# EAGLE board INTERFACE_MK20DX128VFM5 (EAGLE 7.6.0)
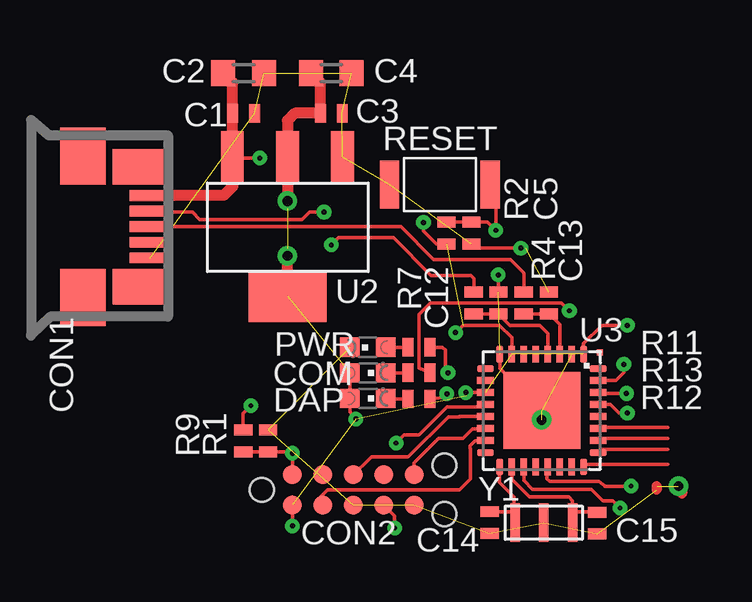
[diagram p0: board, top side]
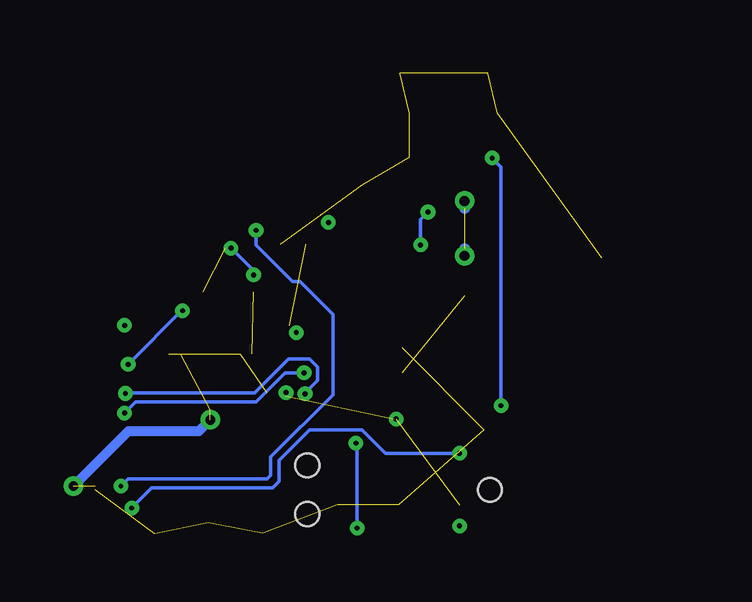
[diagram p1: board, bottom side, seen from below]

No outline drawn. Coordinates in mm, seen from the top.
Copper layers ((1*16)): Top 0.035mm / dielectric 0.8mm / Bottom 0.035mm
Design rules "mbed-HDK-6-6-2-layer": minimum track width 6mil, minimum drill 9mil, track to track 6mil, track to pad 6mil, pad to pad 6mil, via to via 6mil, smd to smd 6mil, copper to edge 15mil, drill to drill 8mil, minimum pad ring 10mil, minimum via ring 8mil, stop-mask expansion 4mil, vias tented up to drill 0mil, thermal gap 10mil

## Footprints (pad centres in the part's own frame; a part is rotated, then mirrored left to right if it is on the bottom)
0402 = smd 0.457 x 0.762: 1 -0.457,0; 2 0.457,0
0603 = smd 1 x 1.1: 1 -0.85,0; 2 0.85,0
USB-MICRO-B-H = smd 1.7 x 0.45: 4 2.8,-0.65; D+ 2.8,0; D- 2.8,0.65; GND 2.8,-1.3; VBUS 2.8,1.3 | smd 1.9 x 2.375: GND1 0,2.95; GND4 0,-2.95 | smd 2.1 x 1.475: GND2 2.3,2.5; GND3 2.3,-2.5
TC2050-IDC-NL = smd 0.787 x 0.787: 1 -2.54,-0.635; 2 -1.27,-0.635; 3 0,-0.635; 4 1.27,-0.635; 5 2.54,-0.635; 6 2.54,0.635; 7 1.27,0.635; 8 0,0.635; 9 -1.27,0.635; 10 -2.54,0.635 | hole 0.991: -3.81,0; 3.81,1.016; 3.81,-1.016
CHIPLED_0603 = smd 0.8 x 0.8: A 0,-0.75; C 0,0.75
SKRKAEE010 = smd 0.8 x 2: P$1 -2.1,0; P$2 2.1,0
SOT223 = smd 0.95 x 2.15: GND -2.3,-5.8; IN 2.3,-5.8; OUT(1) 0,-5.8 | smd 3.25 x 2.15: OUT(2) 0,0
HVQFN33 = smd 0.7 x 0.28: 1 -2.35,1.75; 2 -2.35,1.25; 3 -2.35,0.75; 4 -2.35,0.25; 5 -2.35,-0.25; 6 -2.35,-0.75; 7 -2.35,-1.25; 8 -2.35,-1.75; 17 2.35,-1.75; 18 2.35,-1.25; 19 2.35,-0.75; 20 2.35,-0.25; 21 2.35,0.25; 22 2.35,0.75; 23 2.35,1.25; 24 2.35,1.75 | smd 0.28 x 0.7: 9 -1.75,-2.35; 10 -1.25,-2.35; 11 -0.75,-2.35; 12 -0.25,-2.35; 13 0.25,-2.35; 14 0.75,-2.35; 15 1.25,-2.35; 16 1.75,-2.35; 25 1.75,2.35; 26 1.25,2.35; 27 0.75,2.35; 28 0.25,2.35; 29 -0.25,2.35; 30 -0.75,2.35; 31 -1.25,2.35; 32 -1.75,2.35 | smd 3.2 x 3.2: EXP 0,0 | smd 0.25 x 0.25: M1 -2.415,2.415
CSTCE8M00G55-R0 = smd 0.4 x 1.6: 1 2.4,0; 2 1.2,0; 3 0,0

## Placement (x,y rotation side)
C1  100nF  [0402]  -6.25,9.6 0 top
C2  10uF  [0603]  -6.25,11.28 0 top
C3  100nF  [0402]  -2.59,9.6 0 top
C4  10uF  [0603]  -2.59,11.28 0 top
C5  100nF  [0402]  3.26,4.61 270 top
C12  18pF  [0402]  4.38,1.7 90 top
C13  18pF  [0402]  6.48,1.7 90 top
C14  22pF  [0402]  4.01,-7.46 270 top
C15  22pF  [0402]  8.49,-7.49 270 top
CON1  47346-0001  [USB-MICRO-B-H]  -12.95,4.88 0 top
CON2  TC2050-IDC-NL  [TC2050-IDC-NL]  -1.68,-6.1 0 top
LED3  RED  [CHIPLED_0603]  -1.07,-0.15 90 top
LED4  BLUE  [CHIPLED_0603]  -1.07,-2.29 270 top
LED5  GREEN  [CHIPLED_0603]  -1.07,-1.22 270 top
R1  10K  [0402]  -5.22,-4.05 90 top
R2  10K  [0402]  2.21,4.61 90 top
R4  33R  [0402]  5.43,1.7 270 top
R7  33R  [0402]  3.34,1.7 270 top
R9  4.7K  [0402]  -6.26,-4.05 270 top
R11  470R  [0402]  1.07,-0.15 0 top
R12  1.5K  [0402]  1.07,-2.31 0 top
R13  1.5K  [0402]  1.07,-1.22 0 top
RESET  SKRKAEE010  [SKRKAEE010]  1.93,6.63 0 top
U2  TLV1117LV33DCYR  [SOT223]  -4.42,1.98 180 top
U3  IF_MK20DX128VFM5  [HVQFN33]  6.18,-2.79 270 top
Y1  CSTCE8M00G55-R0  [CSTCE8M00G55-R0]  7.47,-7.47 180 top

## Library data of the parts
C1 C3 C5 C12-C15 R1 R2 R4 R7 R9 R11-R13 = mbed-HDK-RLCQ
C2 C4 = mbed-HDK-RLC
CON1 = mbed-HDK-Connector; MF: MOLEX; MFN: 47346-0001; OC-MOUSER: 538-47346-0001; OC-NEWARK: 1568026
CON2 = mbed-HDK-Connector
LED3-LED5 = mbed-HDK-Optical; MF: Wurth Electronics Inc; MFN: 150060RS75000; OC-DIGIKEY: 732-4978-1-ND; OC-MOUSER: 710-150060RS75000; OC-NEWARK: 2322071
RESET = mbed-HDK-Switch; MF: ALPS; MFN: SKRKAEE010; OC-MOUSER: 688-SKRKAE
U2 = mbed-HDK-Power; MF: Texas Instruments; MFN: TLV1117LV33DCYR; OC-DIGIKEY: 296-28778-1-ND; OC-MOUSER: 595-TLV1117LV33DCYR; OC-NEWARK: 2323647
U3 = mbed-HDK-MF-NXP; MF: NXP; MFN: MK20DX128VFM5; OC-DIGIKEY: MK20DX128VFM5-ND; OC-MOUSER: 841-MK20DX128VFM5; OC-NEWARK: 2133567
Y1 = mbed-HDK-Oscillator; MF: Murata; MFN: CSTCE8M00G55-R0; OC-DIGIKEY: 490-1195-1-ND; OC-MOUSER: 81-CSTCE8M00G55-R0; OC-NEWARK: 2443270

## Nets
+3.3V: C3.1 C4.1 CON2.1 LED4.A LED5.A R2.1 U2.OUT(1) U2.OUT(2) U3.1 U3.7 U3.11
+5V: C1.1 C2.1 CON1.VBUS R9.1 U2.IN
GND: C1.2 C2.2 C3.2 C4.2 C5.2 C12.2 C13.2 C14.2 C15.2 CON1.GND CON2.3 CON2.5 LED3.C R1.2 RESET.P$1 U2.GND U3.2 U3.8 U3.EXP Y1.2
HID: R12.2 U3.30
IF_NRESET: CON2.10 R1.1 R9.2 U3.19
IF_SWCLK: CON2.4 U3.12
IF_SWDIO: CON2.2 U3.15
IF_TDI: CON2.8 U3.13
IF_TDO: CON2.6 U3.14
MSD: R11.2 U3.29
N$1: LED3.A R11.1
N$21: C13.1 R4.2 U3.3
N$24: C12.1 R7.2 U3.4
N$35: LED4.C R12.1
N$36: LED5.C R13.1
N$37: C15.1 U3.18 Y1.3
N$40: C14.1 U3.17 Y1.1
TGT_NRESET: C5.1 R2.2 RESET.P$2 U3.21
TGT_RX: U3.25
TGT_SWCLK: U3.26
TGT_SWDIO: U3.27
TGT_TX: U3.24
TGT_USB_D+: CON1.D+ R4.1
TGT_USB_D-: CON1.D- R7.1
UART: R13.2 U3.31

## Tracks (layer width: path | path; a pad name or v marks a point on that pad's centre or on a via)
+3.3V  (via drill 0.2, 0.41)  (7 unrouted)
  Top 0.152: LED5.A LED4.A -1.82,-2.84 v-1.57,-3.15 | U3.7 4.93,0.25 4.42,0.76 2.9,0.76 v2.59,0.46 | U3.11 3.06,-2.04 v3.02,-2.04 | CON2.1 v-4.22,-7.61 v-4.21,-7.61 | R2.1 1.8,4.15 1.25,4.7 v1.25,5.05 | U3.1 7.92,0 8.69,0.76 v9.75,0.76
  Top 0.457: C4.1 -3.05,10.88 C3.1 -4.12,9.6 -4.42,9.3 U2.OUT(1) | -4.42,7.32 U2.OUT(1) | U2.OUT(1) v-4.42,5.94 | U2.OUT(2) v-4.42,3.66
  Bottom 0.152: v-1.57,-3.15 -1.54,-3.09 -1.49,-3.14 | v2.59,0.46 2.59,0.3 | v3.02,-2.04 3.06,-2.15 3.04,-2.18 | v-4.21,-7.61 -4.21,-7.73 -4.24,-7.76 | v1.25,5.05 1.25,5.15 1.22,5.19 | v9.75,0.76 9.91,0.76
  Bottom 0.457: v-4.42,5.94 -4.42,5.64 | v-4.42,3.66 -4.42,3.96
+5V  (via drill 0.2)
  Top 0.152: R9.1 -6.26,-2.91 v-5.94,-2.59 | v-5.57,7.74 -6.68,7.74 U2.IN
  Top 0.457: -6.71,7.79 -6.71,6.55 -7.08,6.18 CON1.VBUS | -6.71,7.79 U2.IN | -6.71,7.79 C1.1 -6.71,10.88 C2.1
  Bottom 0.152: v-5.94,-2.59 -5.94,7.37 v-5.57,7.74
GND  (via drill 0.2, 0.41)  (19 unrouted)
  Top 0.152: C12.2 4.38,2.86 v4.37,2.87 | 5.54,3.99 5.53,3.98 v5.31,3.98 3.43,3.98 C5.2 | U3.8 4.43,-1.03 4.89,-1.48 4.89,-1.49 U3.EXP
  Top 0.406: 10.97,-5.94 10.97,-6.1 | v11.89,-5.94 12.04,-6.1 12.04,-6.25
  Bottom 0.152: v4.37,2.87 4.37,3.04 v5.31,3.98
  Bottom 0.406: v6.18,-3.18 6.66,-3.66 9.6,-3.66 v11.89,-5.94
HID  (via drill 0.2)
  Top 0.152: R12.2 2.1,-2.25 v2.23,-2.09 | v9.72,-2.08 8.57,-2.08 U3.30
  Bottom 0.152: v2.23,-2.09 2.28,-2.12 1.83,-1.67 1.7,-1.54 1.7,-0.98 2.03,-0.65 2.92,-0.65 4.33,-2.06 9.65,-2.06 v9.72,-2.08
IF_NRESET  (via drill 0.2)
  Top 0.152: U3.19 5.43,-5.71 5.79,-6.07 8.26,-6.07 8.74,-6.55 9.14,-6.55 v9.45,-6.86 | CON2.10 v-4.22,-4.58 v-4.21,-4.57 -4.28,-4.51 R1.1 | R9.2 R1.1 | R1.1
  Bottom 0.152: v-4.21,-4.57 -1.14,-4.57 -0.15,-3.59 2.04,-3.59 3.31,-4.86 3.31,-5.75 3.59,-6.02 8.61,-6.02 v9.45,-6.86
IF_SWCLK  (via drill 0.2)
  Top 0.152: v0.06,-7.69 v0.05,-7.69 0.05,-7.19 CON2.4 | U3.12 3.73,-2.65 2.23,-2.65 1.07,-3.81 0.45,-3.81 v0.11,-4.15
  Bottom 0.152: v0.06,-7.69 0.06,-4.2 v0.11,-4.15
IF_SWDIO
  Top 0.152: 3.58,-4.04 U3.15 3.81,-4.07 3.39,-4.07 3.19,-4.26 3.19,-4.37 3.2,-4.38 3.2,-5.64 2.74,-6.1 -2.74,-6.1 -3.05,-6.4 -3.05,-6.63 CON2.2
IF_TDI
  Top 0.152: CON2.8 -1.22,-5.03 -0.91,-4.72 0.61,-4.72 2.29,-3.05 2.74,-3.05 2.75,-3.04 U3.13
IF_TDO
  Top 0.152: 3.8,-3.5 U3.14 3.81,-3.56 3.3,-3.56 2.9,-3.96 1.88,-3.96 0.86,-4.98 CON2.6
MSD  (via drill 0.2)
  Top 0.152: R11.2 2.05,-0.15 2.16,-0.26 2.16,-1.11 v2.27,-1.22 | v9.75,-2.9 9.4,-2.9 9.04,-2.54 U3.29 | 8.31,-2.54 U3.29 | U3.29
  Bottom 0.152: v2.27,-1.22 3.05,-1.22 4.27,-2.44 9.3,-2.44 v9.75,-2.9
N$1
  Top 0.152: LED3.A R11.1
N$21
  Top 0.152: R4.2 C13.1 6.93,0.79 U3.3
N$24
  Top 0.152: R7.2 C12.1 4.86,0.76 6.1,0.76 6.43,0.42 U3.4
N$35
  Top 0.152: R12.1 -0.29,-2.31 LED4.C
N$36
  Top 0.152: R13.1 LED5.C
N$37
  Top 0.152: U3.18 4.94,-5.67 5.67,-6.4 7.32,-6.4 7.47,-6.55 7.47,-7.01 | 7.47,-7.01 Y1.3 | C15.1 8.48,-7.01 7.47,-7.01
N$40
  Top 0.152: U3.17 4.42,-5.16 4.42,-5.79 5.03,-6.4 5.03,-7.01 | Y1.1 5.03,-7.43 5.03,-7.01 | C14.1 5.03,-7.01
TGT_NRESET  (via drill 0.2)
  Top 0.152: RESET.P$2 4.27,6.33 v4.27,4.72 3.92,5.07 C5.1 3.35,5.16 3.35,5.18 3.23,5.06 R2.2 | U3.21 6.4,-5.18 6.4,-5.64 6.52,-5.76 8.57,-5.76 8.81,-5.94 v9.91,-5.94
  Bottom 0.152: v4.27,4.72 4.27,4.12 2.74,2.59 2.44,2.59 1.07,1.22 1.07,-2.13 3.66,-4.72 3.66,-5.49 3.81,-5.64 9.6,-5.64 v9.91,-5.94
TGT_RX
  Top 0.152: U3.25 8.66,-4.42 11.43,-4.42
TGT_SWCLK
  Top 0.152: U3.26 8.61,-3.96 11.43,-3.96
TGT_SWDIO
  Top 0.152: U3.27 8.57,-3.5 11.43,-3.5
TGT_TX
  Top 0.152: U3.24 8.05,-5.03 11.43,-5.03
TGT_USB_D+
  Top 0.152: CON1.D+ 0.3,4.88 1.68,3.5 4.88,3.5 5.43,2.95 R4.1
TGT_USB_D-  (via drill 0.2)
  Top 0.152: v-2.59,4.12 -2.29,4.42 0,4.42 1.57,2.85 3.23,2.85 3.35,2.72 3.35,1.98 3.34,1.99 R7.1 | v-2.9,5.49 -3.5,5.49 -3.81,5.18 -8.08,5.18 -8.38,5.49 -10.11,5.49 CON1.D-
  Bottom 0.152: v-2.59,4.12 -2.59,5.18 v-2.9,5.49
UART  (via drill 0.2)
  Top 0.152: v7.34,1.37 7.01,1.7 1.55,1.7 1.07,1.22 1.07,-1.02 R13.2 | v9.6,-0.87 9.6,-1.21 9.27,-1.54 U3.31
  Bottom 0.152: v7.34,1.37 7.37,1.37 v9.6,-0.87

## Text on the board
tPlace: PWR | COM | DAP